# Allegro board LinkingInterfaceV2_16.1.brd
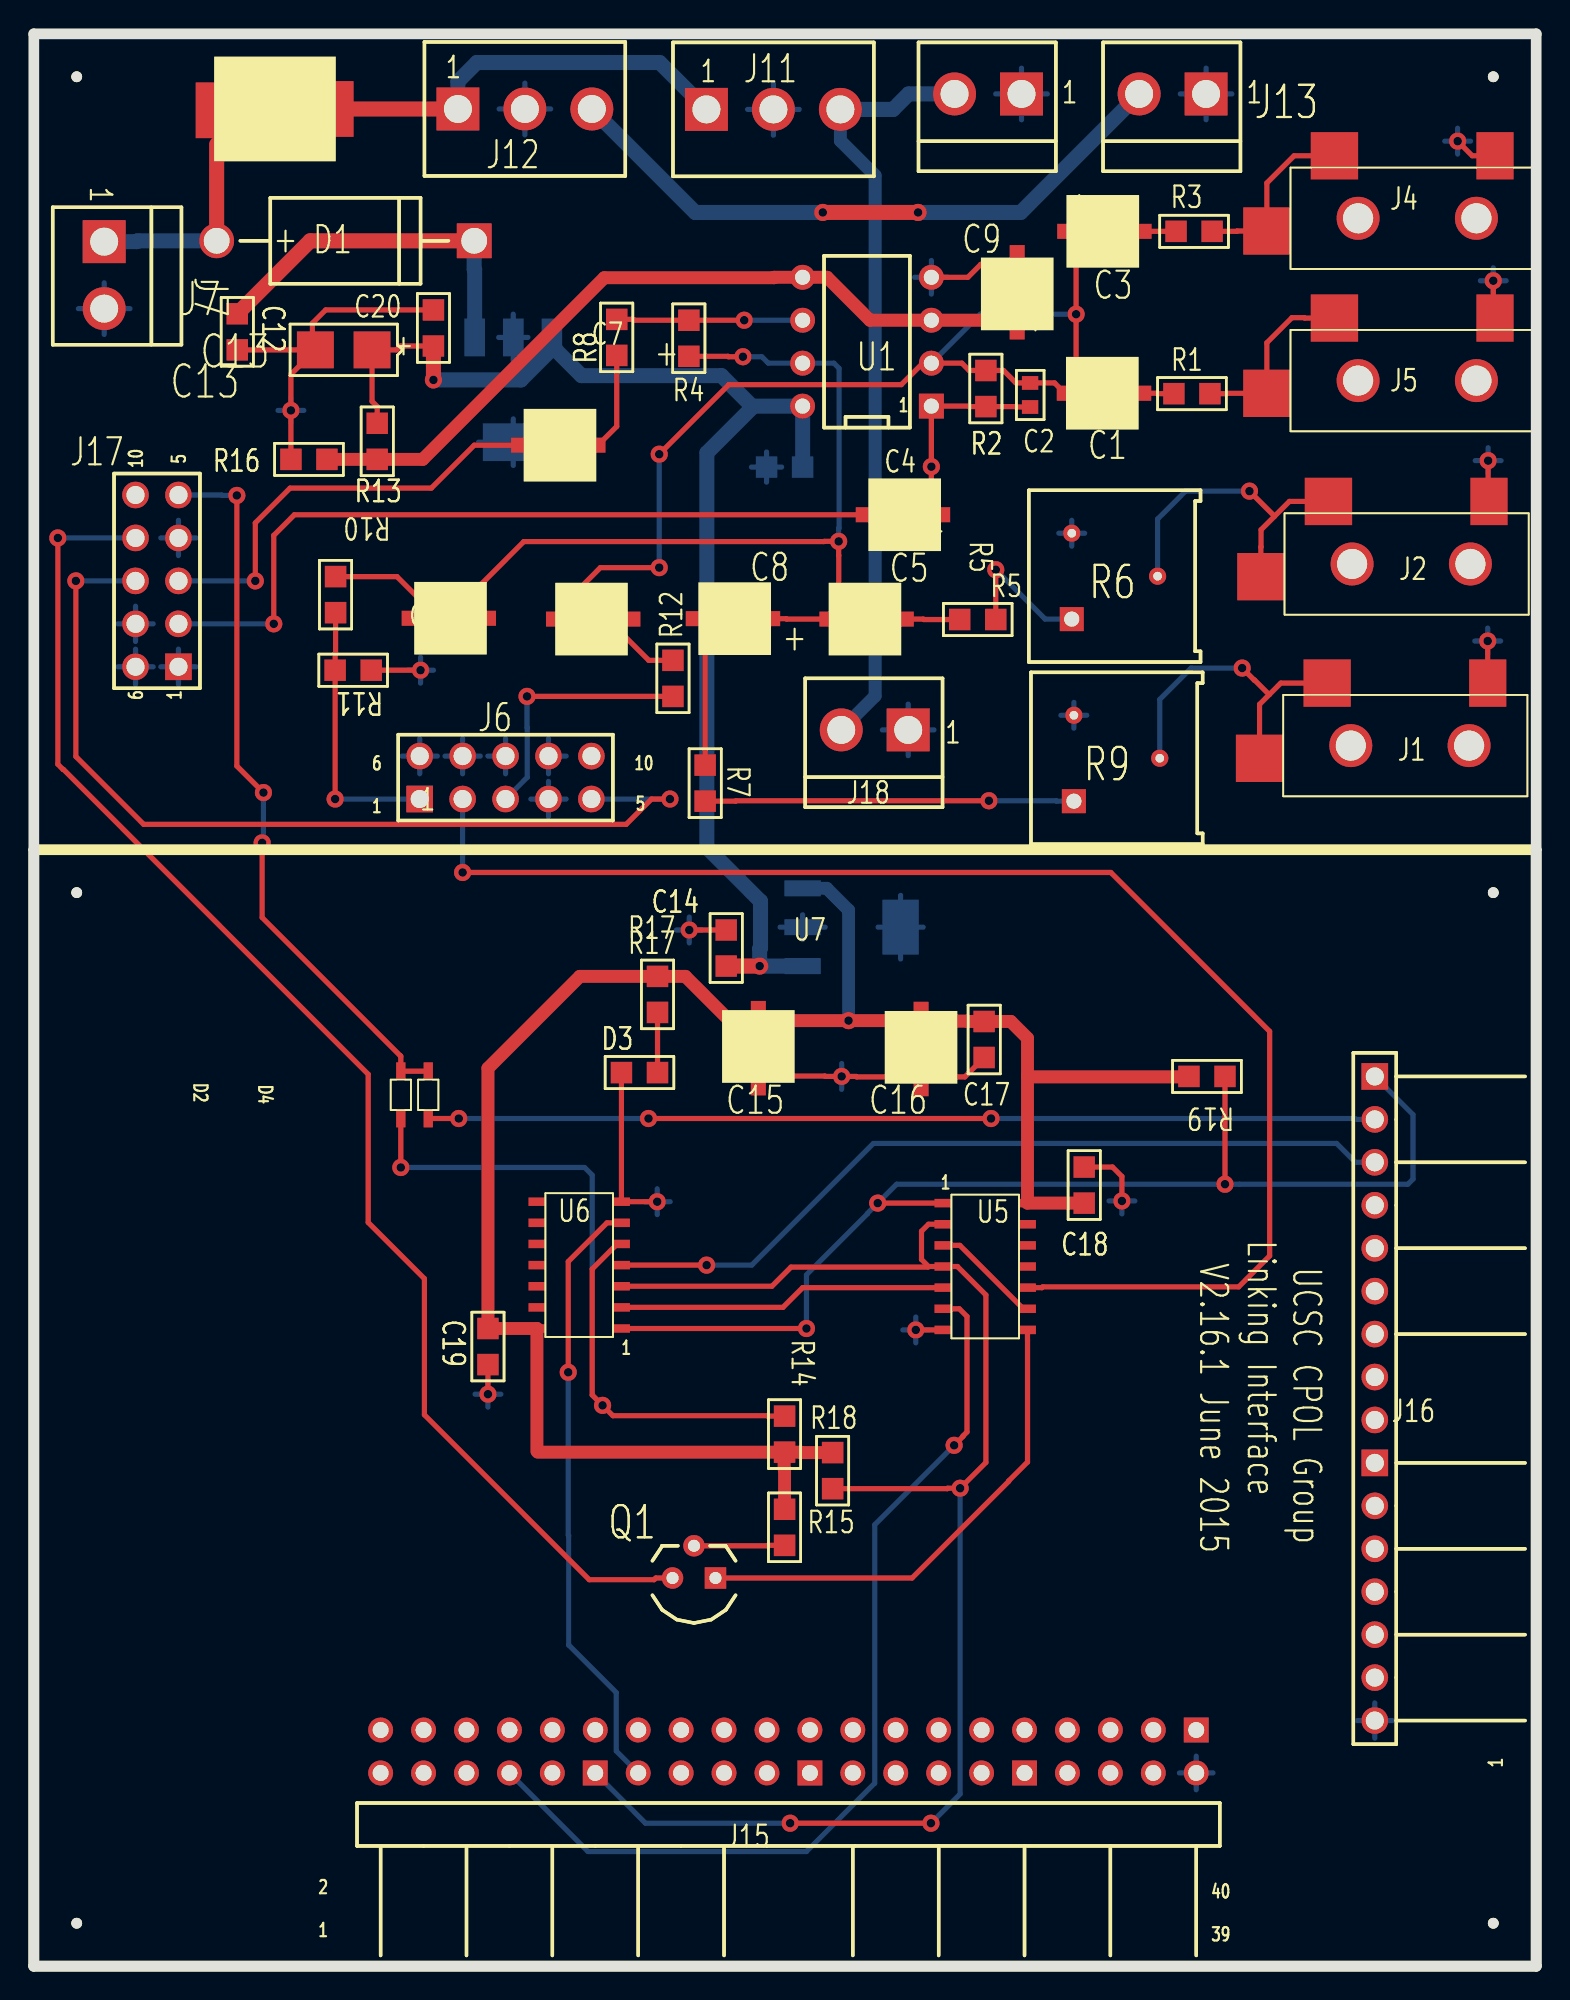
[diagram p0: board, top side]
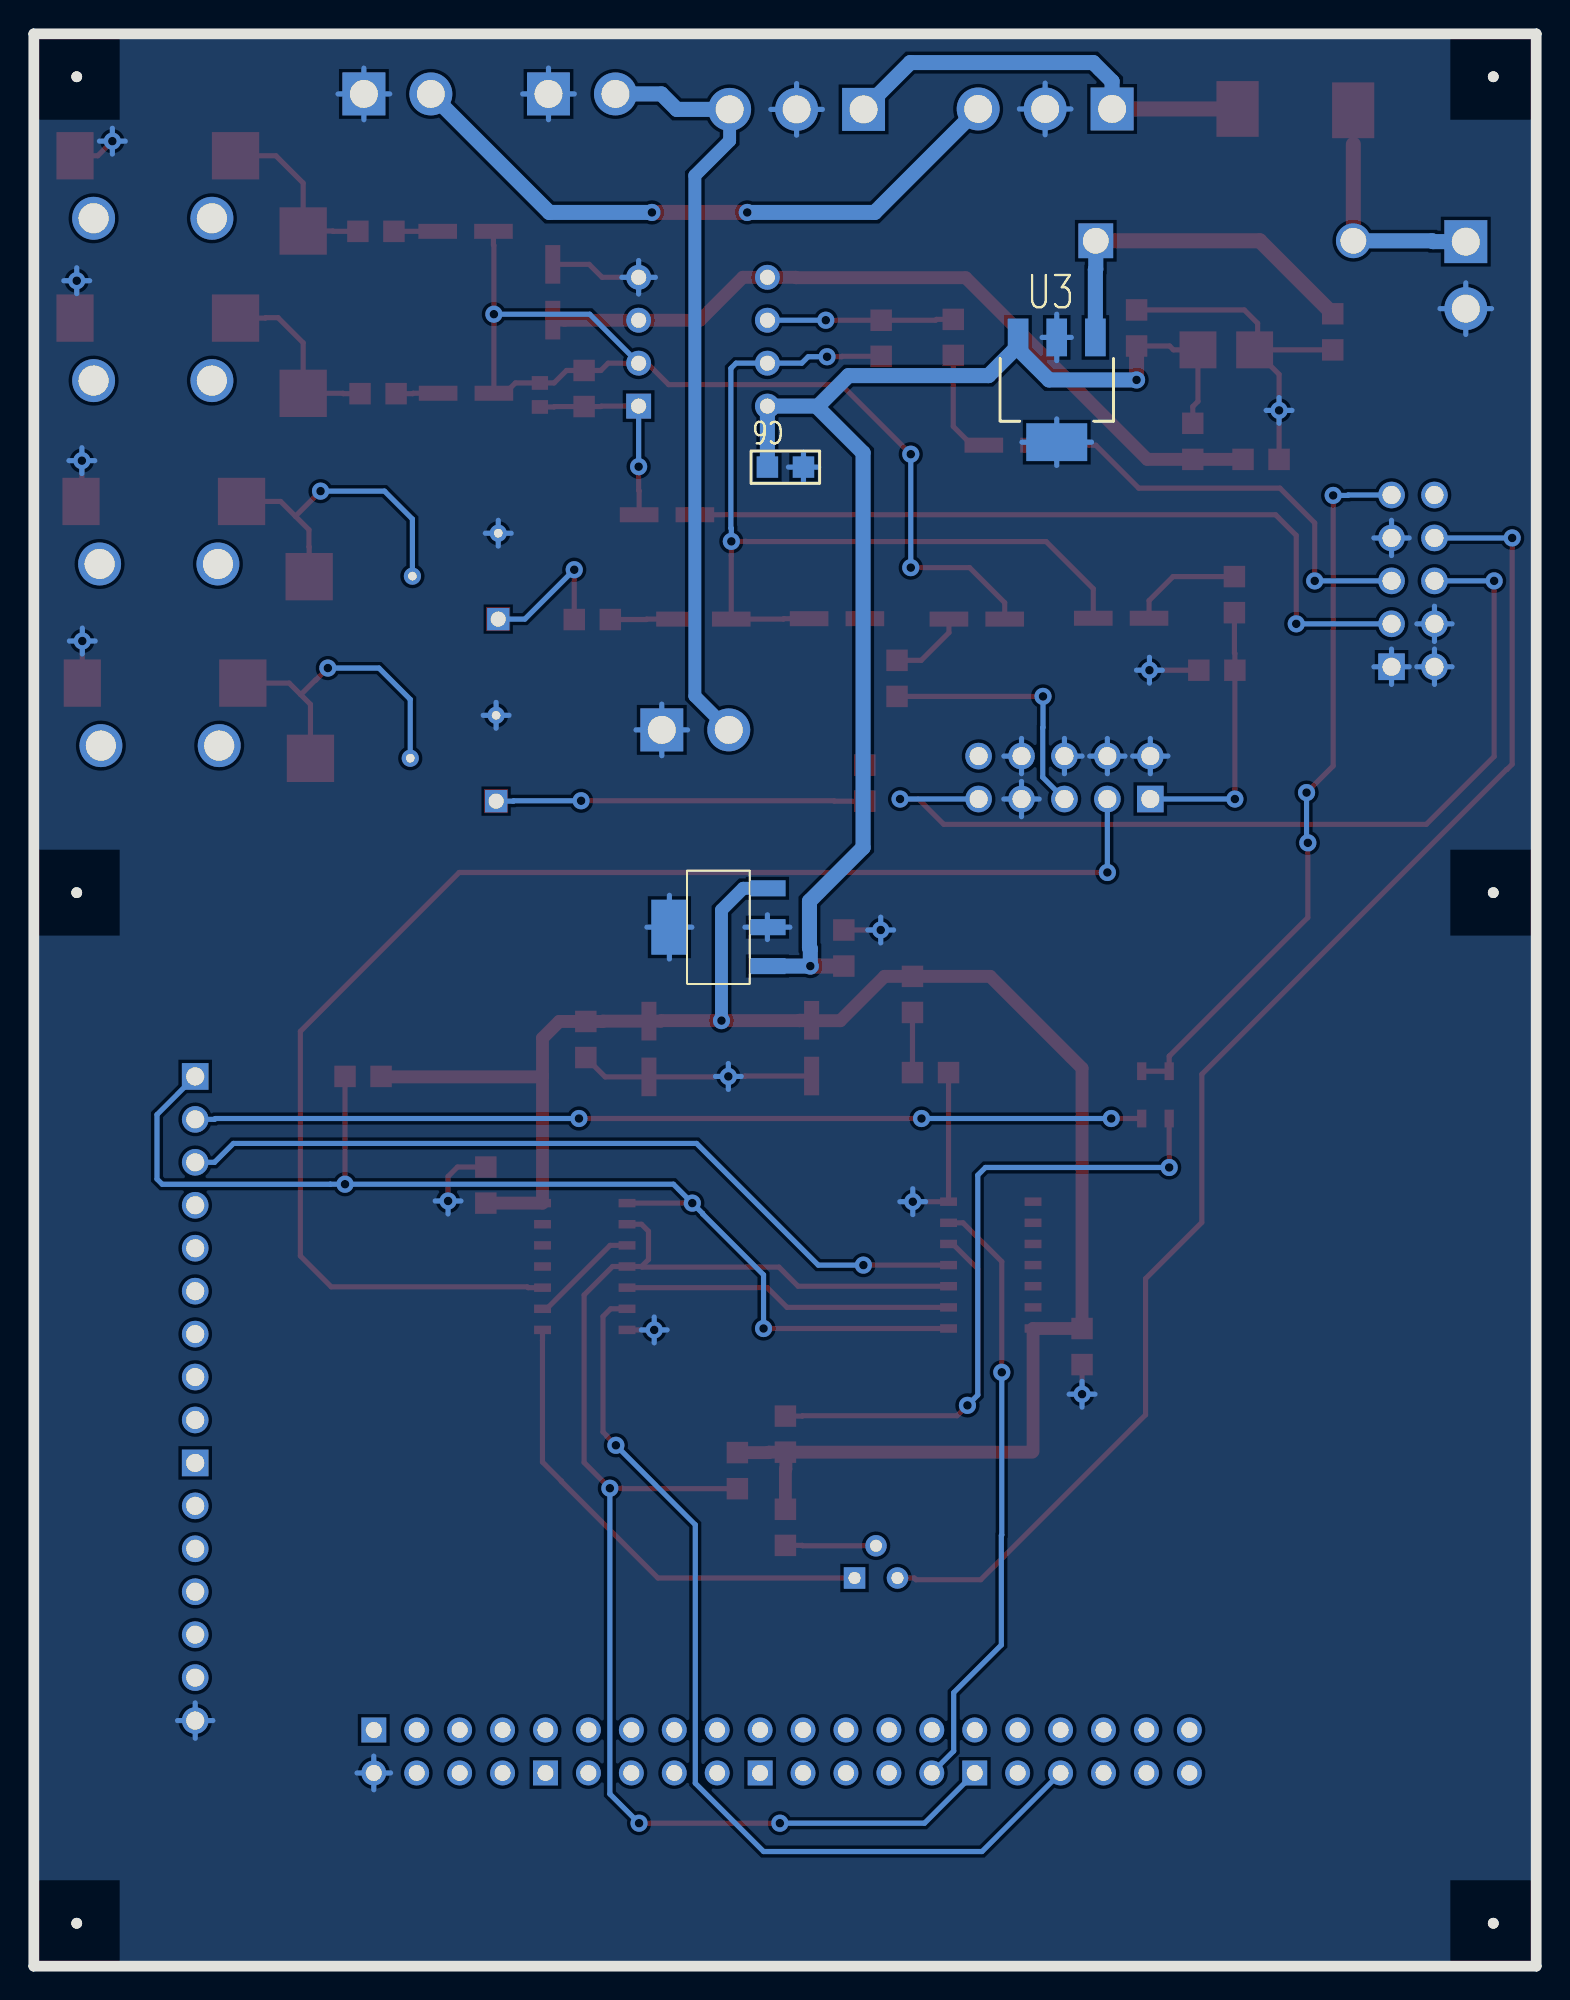
[diagram p1: board, bottom side, seen from below]

Outline 88.9 x 114.3 mm; copper layers: TOP, BOTTOM. Coordinates in mm from the lower left corner of the outline.
Outline path: rectangle 0,0 88.9,114.3 ; 0,114.3 0,0 88.9,0 88.9,114.3 0,114.3

## Placement (name value [footprint] x y rotation side)
C1  10uF  [1_UF_CAP]  61.98 93.04 270 top
C2  100pF  [SMC0603]  58.95 92.23 90 top
C3  10uF  [1_UF_CAP]  62 102.62 270 top
C4  10uF  [1_UF_CAP]  52.78 85.85 90 top
C5  10uF  [1_UF_CAP]  47.93 79.68 270 top
C6  100nF  [SMC0805]  43.36 88.67 0 bottom
C7  1uF  [1_UF_CAP]  32.38 89.97 90 top
C8  10uF  [1_UF_CAP]  42.72 79.71 90 top
C9  4.7uF  [1_UF_CAP]  58.19 97.66 0 top
C10  10uF  [1_UF_CAP]  25.91 79.73 90 top
C11  10uF  [1_UF_CAP]  31.75 79.68 270 top
C12  470nF  [SMC0805]  12.04 97.74 270 top
C13  22uF/Tant  [EIAB_SMCT3528_12]  20.02 95.61 180 top
C14  100nF  [SMC0805]  40.97 61.29 270 top
C15  10uF  [1_UF_CAP]  42.88 55.65 180 top
C16  10uF  [1_UF_CAP]  52.5 55.6 180 top
C17  100nF  [SMC0805]  56.24 53.75 90 top
C18  100nF  [SMC0805]  62.15 47.27 270 top
C19  100nF  [SMC0805]  26.87 37.72 270 top
C20  100nF  [SMC0805]  23.65 97.97 270 top
D1  SB1245  [DAX600_60D]  10.82 102.06 0 top
D2  1N4148  [1N4148_SOD523]  21.72 50.14 0 top
D3  RED  [SMR0805]  36.91 52.86 180 top
D4  1N4148  [1N4148_SOD523]  23.34 50.14 0 top
D5  -  [B320]  10.87 109.86 0 top
J1  TX_Echo  [35MMJACK]  86.51 97.54 0 top
J2  TX_Allstar  [35MMJACK]  86.51 107.14 0 top
J4  RX_Echo  [35MMJACK]  86.16 86.69 0 top
J5  Rx_Allstar  [35MMJACK]  86.08 75.95 0 top
J6  10 Pin Header to DTMF Ctrl  [BCON2DB9_5X2V_100S_42D]  22.83 69.04 0 top
J7  0.156 VH  [BLKCON156_VHTM1SQ_SW156_2]  4.17 102.01 270 top
J11  HEADER 3  [BLKCON156VHTM1SQSW3123]  39.8 109.83 0 top
J12  HEADER 3  [BLKCON156VHTM1SQSW3123]  25.1 109.86 0 top
J13  0.156 VH  [BLKCON156_VHTM1SQ_SW156_2]  69.37 110.74 180 top
J14  0.156 VH  [BLKCON156_VHTM1SQ_SW156_2]  58.45 110.74 180 top
J15  HEADER 20X2  [BLKCON100RHTM2OEW52540]  68.78 13.97 180 top
J16  HEADER 16  [BLKCON100RHTM1SQSW35016]  79.35 52.63 270 top
J17  HEADER 9  [BCON2DB9_5X2V_100S_42D]  8.56 76.86 90 top
J18  0.156 VH  [BLKCON156_VHTM1SQ_SW156_2]  51.74 73.13 180 top
NOREF  -  [unnamed]  86.36 63.5 180 bottom
NOREF#2  -  [unnamed]  2.54 63.5 180 bottom
NOREF#3  -  [unnamed]  86.36 111.76 180 bottom
NOREF#4  -  [unnamed]  2.54 2.54 180 bottom
NOREF#5  -  [unnamed]  2.54 111.76 180 bottom
NOREF#6  -  [unnamed]  86.36 2.54 180 bottom
Q1  2N2222  [TO92R100]  39.07 22.96 180 top
R1  51k  [SMR0805]  67.46 93.01 0 top
R2  51k  [SMR0805]  56.34 92.25 90 top
R3  51k  [SMR0805]  67.59 102.62 0 top
R4  51k  [SMR0805]  38.76 97.36 270 top
R5  7.5k  [SMR0805]  54.79 79.65 0 top
R6  10k  [VRES18_35D]  63.96 82.22 90 top
R7  7.5k  [SMR0805]  39.73 71.04 270 top
R8  51k  [SMR0805]  34.49 95.28 90 top
R9  10k  [VRES18_35D]  64.08 71.45 90 top
R10  7.5k  [SMR0805]  17.86 82.19 270 top
R11  10k  [SMR0805]  19.96 76.66 180 top
R12  51k  [SMR0805]  37.82 77.24 270 top
R13  51k  [SMR0805]  20.32 89.13 90 top
R14  10k  [SMR0805]  44.42 32.54 270 top
R15  10k  [SMR0805]  44.42 27.03 270 top
R16  51k  [SMR0805]  15.21 89.13 0 top
R17  330  [SMR0805]  36.91 56.41 90 top
R18  10k  [SMR0805]  47.27 28.24 90 top
R19  10k  [SMR0805]  70.48 52.63 180 top
U1  TL072  [DIP100_8_W300_L400]  53.11 92.28 90 top
U3  LM2940 / SOT223  LDO  [SOT223_1234]  26.09 96.34 0 bottom
U5  74HC08  [74HC0]  53.8 45.14 270 top
U6  74HC04  [74HC0]  34.77 37.72 90 top
U7  LM2936/SO_5  [LM2936_SOT]  45.44 59.16 90 bottom

## Library data of the parts
C1 C3 C7 C11 = CAPACITOR POL
C2 C6 C12 C14 C17-C20 = C NP
C4 C5 C8-C10 C15 C16 = CAP POL
C13 = C POL
D1 D5 = DIODE SCHOTTKY_0
D2 D4 = 1N4148
D3 = LED
J1 J2 J4 J5 = PHONE JACK-3_2
J6 = HEADER 9_0
J7 J13 J14 J18 = HEADER 2_4
J11 J12 = HEADER 3
J15 = HEADER 20X2
J16 = HEADER 16
J17 = HEADER 9
Q1 = 2N2222
R1-R5 R7 R8 R10-R19 = RESISTOR
R6 R9 = POT
U1 = TL072_0
U3 = 78L05/TO92_0
U5 = 74HC08_4
U6 = 74HC04_5
U7 = LM2936/SO_13

## Footprints (pads in the part's own frame, mm; a bottom-side part is the same pattern mirrored in y, then rotated)
1_UF_CAP
  rect 0.889x2.286 smd: 1(0,-0.3) 2(0,3)
1N4148_SOD523
  rect 0.551x1.049 smd: 1(0,0) 2(0,2.799)
35MMJACK
  round 2.54 hole 1.778: (-8.151,-3.749) (-1.151,-3.749)
  rect 2.2x2.799 smd: 1(-0.051,-0.051)
  rect 2.799x2.799 smd: 2(-9.55,-0.051) 3(-13.551,-4.501)
74HC0
  rect 0.5x1.001 smd: 1(0,0) 2(1.25,0) 3(2.499,0) 4(3.749,0) 5(5.001,0) 6(6.251,0) 7(7.501,0) 8(7.501,5.001) 9(6.251,5.001) 10(5.001,5.001) 11(3.749,5.001) 12(2.499,5.001) 13(1.25,5.001) 14(0,5.001)
B320
  rect 2.499x3.299 smd: 1(-0.041,-0.079) 2(6.8,0)
BCON2DB9_5X2V_100S_42D
  round 1.575 hole 1.067: (10.16,2.54) 2(2.54,0) 3(5.08,0) 4(7.62,0) 5(10.16,0) 6(0,2.54) 7(2.54,2.54) 8(5.08,2.54) 9(7.62,2.54)
  rect 1.575x1.575 hole 1.067: 1(0,0)
BLKCON100RHTM1SQSW35016
  rect 1.575x1.575 hole 1.067: 1(0,0) 10(22.86,0)
  round 1.575 hole 1.067: 2(2.54,0) 3(5.08,0) 4(7.62,0) 5(10.16,0) 6(12.7,0) 7(15.24,0) 8(17.78,0) 9(20.32,0) 11(25.4,0) 12(27.94,0) 13(30.48,0) 14(33.02,0) 15(35.56,0) 16(38.1,0)
BLKCON100RHTM2OEW52540
  rect 1.473x1.473 hole 0.94: 1(0,0) 10(10.16,2.54) 20(22.86,2.54) 30(35.56,2.54)
  round 1.473 hole 0.94: 2(0,2.54) 3(2.54,0) 4(2.54,2.54) 5(5.08,0) 6(5.08,2.54) 7(7.62,0) 8(7.62,2.54) 9(10.16,0) 11(12.7,0) 12(12.7,2.54) 13(15.24,0) 14(15.24,2.54) 15(17.78,0) 16(17.78,2.54) 17(20.32,0) 18(20.32,2.54) 19(22.86,0) 21(25.4,0) 22(25.4,2.54) 23(27.94,0) 24(27.94,2.54) 25(30.48,0) 26(30.48,2.54) 27(33.02,0) 28(33.02,2.54) 29(35.56,0) 31(38.1,0) 32(38.1,2.54) 33(40.64,0) 34(40.64,2.54) 35(43.18,0) 36(43.18,2.54) 37(45.72,0) 38(45.72,2.54) 39(48.26,0) 40(48.26,2.54)
BLKCON156_VHTM1SQ_SW156_2
  rect 2.54x2.54 hole 1.651: 1(0,0)
  round 2.54 hole 1.651: 2(3.962,0)
BLKCON156VHTM1SQSW3123
  rect 2.54x2.54 hole 1.651: 1(0,0)
  round 2.54 hole 1.651: 2(3.962,0) 3(7.925,0)
DAX600_60D
  round 2.057 hole 1.524: 1(0,0)
  rect 2.057x2.057 hole 1.524: 2(15.24,0)
DIP100_8_W300_L400
  rect 1.473x1.473 hole 0.889: 1(0,0)
  round 1.473 hole 0.889: 2(2.54,0) 3(5.08,0) 4(7.62,0) 5(7.62,7.62) 6(5.08,7.62) 7(2.54,7.62) 8(0,7.62)
EIAB_SMCT3528_12
  rect 2.184x2.184 smd: 1(0,0) 2(3.353,0)
LM2936_SOT
  rect 0.95x2.149 smd: 1(0,0.051) 2(2.301,0.051) 3(4.6,0.051)
  rect 3.251x2.149 smd: 4(2.301,5.85)
SMC0603
  rect 0.813x0.965 smd: 1(0,0) 2(1.422,0)
SMC0805
  rect 1.27x1.27 smd: 1(0,0) 2(2.134,0)
SMR0805
  rect 1.27x1.27 smd: 1(0,0) 2(2.134,0)
SOT223_1234
  rect 1.219x2.235 smd: 1(0,0) 2(2.286,0) 3(4.572,0)
  rect 3.607x2.235 smd: 4(2.286,6.198)
TO92R100
  rect 1.27x1.27 hole 0.711: 1(-1.27,0)
  round 1.27 hole 0.711: 2(0,-1.905) 3(1.27,0)
unnamed
  round 0.635 hole 3.175 unplated: (0,0)
VRES18_35D
  rect 1.422x1.422 hole 0.889: 1(-2.54,2.54)
  round 1.016 hole 0.508: 2(0,-2.54) 3(2.54,2.54)

## Nets
+3.3V: C15.1 C16.1 C17.2(B) C18.2(B) C19.1(A) R14.2 R15.1 R17.2 R18.2 R19.2 U5.14(+3.3V) U6.14(+3.3V) U7.3(+3.3V)
+4.5V: C9.1 R13.1 R16.2 U1.3(+IN) U1.5(+IN)
+9V: C6.2(B) C13.1(P) C14.2(B) C20.2(B) R13.2 U1.8(+9V) U3.3(+9V) U7.1(+9V)
GND: C6.1(A) C9.2 C12.2(B) C13.2(N) C14.1(A) C15.2 C16.2 C17.1(A) C18.1(A) C19.2(B) C20.1(A) D3.2(CATHODE) J1.1 J2.1 J4.1 J5.1 J6.4 J6.6 J6.7 J6.8 J6.9 J7.2 J11.2 J12.2 J13.1 J14.1 J15.2 J16.16 J17.1 J17.4 J17.6 J17.7 J18.1 R6.3(B) R9.3(B) R11.1 R16.1 U1.4(GND) U3.2(G1) U3.4(G2) U5.7(GND) U6.7(GND) U7.2(GND#2) U7.4(GND#4)
AUDIO_AUX: C7.2 J17.3
AUDIOOUT: C4.2 J17.2
COS: D2.2 D4.2 J17.5
COS_ALLSTAR: D4.1 J16.2
DTMF_AUDIO: J6.1 R10.2 R11.2
DTMF_TONE_CONFIRMATION: J6.3 R12.2
INHIBIT: J6.5 J17.8
PTT: J17.9 Q1.3(COLLECTOR)
PTT_E: J15.30 R18.1 U5.2(B) U5.4(A) U6.3(A)
RX_A: J5.2 J5.3 R9.2(WIPER)
RX_E: J4.2 J4.3 R6.2(WIPER)
TX_A: J2.2 J2.3 R3.2
N88559: C1.1 C2.2(B) C3.1 C11.1 R2.2 U1.2(-IN)
N88575: C2.1(A) C4.1 R2.1 U1.1(OUT)
N89923: C5.1 C8.1 C10.1 R4.2 U1.7(OUT)
N90145: C1.2 R1.1
N90149: C3.2 R3.1
N90849: R4.1 R8.2 U1.6(-IN)
N96497: J15.34 U5.6(Y)
N134507: C5.2 R5.1
N134567: C10.2 R10.1
N134575: C8.2 R7.1
N134810: R5.2 R6.1(A)
N196050: J1.2 J1.3 R1.2
N904010: R7.2 R9.1(A)
N908810: C7.1 R8.1
N14521945: C12.1(A) D1.2(CATHODE) U3.1(IN)
N14527017: J16.1 R19.1 U5.1(A) U6.1(A)
N14538770: D1.1(ANODE) D5.1(ANODE) J7.1
N14545130: J16.3 U6.4(Y)
N14551658: C11.2 R12.1
N14566981: J6.2 U5.10(B)
N14592870: J15.28 U6.6(Y)
N14597991: U5.5(B) U6.2(Y)
N14601768: D5.2(CATHODE) J11.1 J12.1
N14603309: J11.3 J14.2 J18.2
N14603313: J12.3 J13.2
N14619662: D2.1 R14.1 U6.5(A)
N14629991: Q1.1(EMITTER) U5.8(Y)
N14637572: U5.3(Y) U5.9(A)
N145714160: D3.1(ANODE) R17.1
N146226602: Q1.2(BASE) R15.2

Pads without a net: J15 1 3 4 5 6 7 8 9 10 11 12 13 14 15 16 17 18 19 20 21 22 23 24 25 26 27 29 31 32 33 35 36 37 38 39 40; J16 4 5 6 7 8 9 10 11 12 13 14 15; U5 11 12 13; U6 8 9 10 11 12 13

## Via types
v1: diameter 1.016, hole 0.508, TOP to BOTTOM, 53 vias

## Routing (per net, layer and track width the routed paths; a pad name or vN(x,y) marks a point on that pad's centre or on a via; arc(x,y) is an arc through that point)
+3.3V: length 115.4
  TOP w0.305: 29.82,30.4 29.77,30.45
  TOP w0.762: 43.6,55.93 v1(48.21,55.93) 51.77,55.93 51.8,55.9 C16.1 55.22,55.9 55.24,55.88 C17.2 57.81,55.88 58.8,54.89 58.8,52.65 ; 43.6,55.93 43.58,55.95 C15.1 ; 43.6,55.93 43.6,55.93 41.18,55.93 38.56,58.55 R17.2 32.31,58.55 26.87,53.11 C19.1 U6.14 29.77,30.45 ; 58.8,52.65 U5.14 C18.2 ; 58.8,52.65 58.85,52.6 68.12,52.6 68.15,52.63 R19.2 ; 44.4,30.4 29.82,30.4 ; 44.4,30.4 44.4,29.41 44.42,29.39 R15.1 ; 44.4,30.4 R14.2 45.39,30.4 45.42,30.38 R18.2
  BOTTOM w0.762: v1(48.21,55.93) 48.21,62.47 46.92,63.76 U7.3
+4.5V: length 46.4
  TOP w0.762: C9.1 57.49,97.36 57.48,97.36 U1.3 49.48,97.36 46.94,99.9 U1.5 43.81,99.9 43.79,99.87 33.76,99.87 23.01,89.13 R13.1 R16.2
+9V: length 78.7
  TOP w0.305: R13.2 20.32,92.25 20.02,92.56 C13.1 21.46,95.61 21.69,95.83 C20.2
  TOP w0.889: C14.2 v1(42.95,59.16) ; C20.2 v1(23.65,93.83)
  BOTTOM w0.305: 42.6,92.28 42.55,92.23 ; 30.66,95.83 U3.3
  BOTTOM w0.889: C6.2 U1.8 42.6,92.28 ; v1(23.65,93.83) 28.83,93.83 30.66,95.66 30.66,95.83 32.41,94.08 40.69,94.08 42.55,92.23 39.83,89.51 39.83,66.16 43,62.99 43,60.24 42.95,60.19 v1(42.95,59.16) U7.1
GND: length 223.7
  TOP w0.305: C18.1 63.83,47.27 64.39,46.71 v1(64.39,45.26) ; R16.1 v1(15.21,92.02) 15.21,94.16 C13.2 ; J2.1 85.12,107.09 v1(84.25,107.95) ; v1(36.89,45.22) U6.7 D3.2 ; C14.1 v1(38.79,61.29) ; v1(86.06,89.05) 86.06,86.69 J4.1 ; C13.2 C12.2 ; C13.2 16.48,95.78 16.48,97.18 17.27,97.97 C20.1 ; C19.2 v1(26.87,33.83) ; C15.2 46.81,52.65 46.84,52.63 v1(47.8,52.63) 48.67,52.63 48.69,52.6 C16.2 55.09,52.6 C17.1 ; U5.7 v1(52.19,37.64) ; J1.1 86.36,97.59 v1(86.36,99.69) ; J5.1 v1(86.03,78.38) ; R11.1 v1(22.89,76.66) ; C9.2 56.03,100.66 55.27,99.9 U1.4
  BOTTOM w0.305: 29.06,108.33 J12.2 ; J12.2 30.58,109.86 ; J12.2 29.06,111.38 ; J12.2 27.53,109.86 ; 6.02,75.82 J17.6 ; J17.6 7.06,76.86 ; J17.6 4.98,76.86 ; J17.6 6.02,77.9 ; J6.8 27.91,72.62 ; J6.8 26.87,71.58 ; J6.8 27.91,70.53 ; J17.7 6.02,80.44 ; J17.7 6.02,78.36 ; J17.7 7.06,79.4 ; J17.7 4.98,79.4 ; R9.3 62.31,73.99 ; R9.3 61.54,73.23 ; R9.3 61.54,74.75 ; R9.3 60.78,73.99 ; R6.3 62.18,84.76 ; R6.3 61.42,85.52 ; R6.3 60.65,84.76 ; R6.3 61.42,84 ; v1(86.03,78.38) 86.03,79.15 ; v1(86.03,78.38) 86.79,78.38 ; v1(86.03,78.38) 86.03,77.62 ; v1(86.03,78.38) 85.27,78.38 ; 86.36,98.93 v1(86.36,99.69) ; v1(86.36,99.69) 87.12,99.69 ; v1(86.36,99.69) 85.6,99.69 ; v1(86.36,99.69) 86.36,100.46 ; 83.49,107.95 v1(84.25,107.95) ; v1(84.25,107.95) 84.25,107.19 ; v1(84.25,107.95) 85.02,107.95 ; v1(84.25,107.95) 84.25,108.71 ; 29.41,69.04 J6.4 ; J6.4 31.5,69.04 ; J6.4 30.45,67.99 ; J6.4 30.45,70.08 ; 28.37,88.77 U3.4 ; U3.4 28.37,91.52 ; U3.4 26.31,90.14 ; U3.4 30.43,90.14 ; 43.36,87.78 C6.1 ; C6.1 42.47,88.67 ; C6.1 43.36,89.56 ; C6.1 44.25,88.67 ; v1(64.39,45.26) 65.15,45.26 ; v1(64.39,45.26) 63.62,45.26 ; v1(64.39,45.26) 64.39,44.5 ; U7.2 46.82,61.46 ; U7.2 45.49,60.73 ; U7.2 44.16,61.46 ; U7.2 45.49,62.19 ; 79.35,13.48 J16.16 ; J16.16 80.39,14.53 ; J16.16 79.35,15.57 ; J16.16 78.31,14.53 ; J6.7 26.42,71.58 ; J6.7 25.37,70.53 ; J6.7 24.33,71.58 ; J6.7 25.37,72.62 ; v1(86.06,89.05) 86.82,89.05 ; v1(86.06,89.05) 86.06,89.82 ; v1(86.06,89.05) 85.29,89.05 ; v1(86.06,89.05) 86.06,88.29 ; J6.6 22.83,72.62 ; J6.6 22.83,70.53 ; J6.6 21.79,71.58 ; J6.6 23.88,71.58 ; J14.1 58.45,112.27 ; J14.1 58.45,109.22 ; J14.1 56.92,110.74 ; J14.1 59.97,110.74 ; J13.1 69.37,112.27 ; J13.1 67.84,110.74 ; J13.1 69.37,109.22 ; J13.1 70.89,110.74 ; v1(22.89,76.66) 23.65,76.66 ; v1(22.89,76.66) 22.89,77.42 ; v1(22.89,76.66) 22.89,75.89 ; v1(22.89,76.66) 22.12,76.66 ; v1(52.19,37.64) 52.95,37.64 ; v1(52.19,37.64) 52.19,36.87 ; v1(52.19,37.64) 52.19,38.4 ; v1(52.19,37.64) 51.42,37.64 ; v1(36.89,45.22) 37.65,45.22 ; v1(36.89,45.22) 36.89,44.46 ; v1(36.89,45.22) 36.12,45.22 ; v1(36.89,45.22) 36.89,45.98 ; 67.79,11.43 J15.2 ; J15.2 68.78,10.44 ; J15.2 69.78,11.43 ; J15.2 68.78,12.42 ; J7.2 4.17,99.57 ; J7.2 4.17,96.52 ; J7.2 2.64,98.04 ; J7.2 5.69,98.04 ; v1(15.21,92.02) 15.98,92.02 ; v1(15.21,92.02) 15.21,92.79 ; v1(15.21,92.02) 14.45,92.02 ; v1(15.21,92.02) 15.21,91.26 ; v1(38.79,61.29) 39.55,61.29 ; v1(38.79,61.29) 38.79,60.53 ; v1(38.79,61.29) 38.79,62.05 ; v1(38.79,61.29) 38.02,61.29 ; v1(47.8,52.63) 47.8,53.39 ; v1(47.8,52.63) 47.8,51.86 ; v1(47.8,52.63) 48.57,52.63 ; v1(47.8,52.63) 47.04,52.63 ; U1.4 54.1,99.9 ; U1.4 53.11,98.91 ; U1.4 52.12,99.9 ; U1.4 53.11,100.89 ; U7.4 51.29,63.34 ; U7.4 49.96,61.46 ; U7.4 52.62,61.46 ; U7.4 51.29,59.58 ; 28.37,94.97 U3.2 ; U3.2 27.51,96.34 ; U3.2 29.24,96.34 ; U3.2 28.37,97.72 ; J17.4 9.6,84.48 ; J17.4 8.56,83.44 ; J17.4 8.56,85.52 ; J17.4 7.52,84.48 ; 42.24,109.83 J11.2 ; J11.2 43.76,108.3 ; J11.2 45.29,109.83 ; J11.2 43.76,111.36 ; 26.11,33.83 v1(26.87,33.83) ; v1(26.87,33.83) 26.87,33.07 ; v1(26.87,33.83) 27.64,33.83 ; v1(26.87,33.83) 26.87,34.6 ; 50.21,73.13 J18.1 ; J18.1 53.27,73.13 ; J18.1 51.74,74.65 ; J18.1 51.74,71.6 ; 30.45,70.53 J6.9 ; J6.9 30.45,72.62 ; J6.9 31.5,71.58 ; J17.1 9.6,76.86 ; J17.1 8.56,77.9 ; J17.1 8.56,75.82 ; J17.1 7.52,76.86
AUDIO_AUX: length 26.2
  TOP w0.305: C7.2 26.06,89.97 23.52,87.43 15.16,87.43 13.11,85.37 v1(13.11,81.94)
  BOTTOM w0.305: J17.3 v1(13.11,81.94)
AUDIOOUT: length 47
  TOP w0.305: v1(14.2,79.4) 14.2,84.63 15.42,85.85 C4.2
  BOTTOM w0.305: J17.2 v1(14.2,79.4)
COS: length 43.2
  TOP w0.305: v1(12.01,87) 12.01,70.99 v1(13.59,69.42) ; v1(13.51,66.45) 13.51,62.03 21.69,53.85 21.69,53.85 21.72,53.82 D2.2 D4.2
  BOTTOM w0.305: v1(13.59,69.42) 13.59,66.52 v1(13.51,66.45) ; v1(12.01,87) 11.15,87 11.13,87.02 J17.5
COS_ALLSTAR: length 56
  TOP w0.305: v1(36.37,50.14) v1(56.64,50.14) ; D4.1 v1(25.15,50.14)
  BOTTOM w0.305: v1(25.15,50.14) v1(36.37,50.14) ; v1(56.64,50.14) 78.16,50.14 78.21,50.09 J16.2
DTMF_AUDIO: length 16
  TOP w0.305: R10.2 17.86,77.67 17.83,77.65 R11.2 v1(17.83,69.04)
  BOTTOM w0.305: v1(17.83,69.04) J6.1
DTMF_TONE_CONFIRMATION: length 15.2
  TOP w0.305: v1(29.18,75.11) R12.2
  BOTTOM w0.305: J6.3 29.2,70.32 29.2,73.26 29.18,73.28 v1(29.18,75.11)
INHIBIT: length 56
  TOP w0.305: v1(37.64,69.04) 36.55,69.04 35.05,67.54 6.5,67.54 2.49,71.55 v1(2.49,81.94)
  BOTTOM w0.305: J17.8 v1(2.49,81.94) ; J6.5 v1(37.64,69.04)
PTT: length 84.2
  TOP w0.305: v1(1.42,84.48) 1.42,71.09 1.73,70.79 1.75,70.79 19.79,52.76 19.79,43.99 23.11,40.67 23.11,32.61 32.87,22.86 36.7,22.86 36.8,22.96 Q1.3
  BOTTOM w0.305: J17.9 v1(1.42,84.48)
PTT_E: length 87.7
  TOP w0.305: U5.2 52.94,43.89 52.53,43.47 52.53,41.8 52.94,41.39 ; 52.94,41.39 52.91,41.35 44.81,41.35 43.67,40.22 U6.3 ; 52.94,41.39 U5.4 54.65,41.39 56.34,39.7 56.34,29.79 v1(54.81,28.27) 54.08,28.27 54.05,28.24 R18.1 ; v1(53.09,8.46) v1(44.75,8.46)
  BOTTOM w0.305: v1(54.81,28.27) 54.81,10.19 v1(53.09,8.46) ; J15.30 36.2,8.46 v1(44.75,8.46)
RX_A: length 19.1
  TOP w0.305: J5.3 72.53,74.64 73.1,75.21 ; 73.1,75.21 72.24,76.07 72.21,76.07 v1(71.5,76.78) ; 73.1,75.21 73.79,75.9 J5.2
  BOTTOM w0.305: R9.2 66.62,74.93 68.48,76.78 v1(71.5,76.78)
RX_E: length 19.1
  TOP w0.305: v1(71.93,87.25) 73.42,85.76 ; 73.42,85.76 72.62,84.96 72.62,83.96 72.61,83.94 J4.3 ; 73.42,85.76 74.3,86.64 J4.2
  BOTTOM w0.305: v1(71.93,87.25) 68.15,87.25 66.5,85.6 R6.2
TX_A: length 10.8
  TOP w0.305: R3.2 71.19,102.62 71.21,102.64 J2.3 72.96,105.47 74.57,107.09 J2.2
N88559: length 61.1
  TOP w0.305: v1(37.01,89.43) 41.12,93.55 51.33,93.55 52.6,94.82 U1.2 54.91,94.82 55.35,94.39 R2.2 57.38,94.39 58.12,93.65 C2.2 60.4,93.65 61.01,93.04 C1.1 v1(61.68,97.71) 61.68,101.79 61.7,101.82 C3.1 ; C11.1 31.45,80.65 33.53,82.73 v1(37.01,82.73)
  BOTTOM w0.305: U1.2 56.01,97.71 v1(61.68,97.71) ; v1(37.01,82.73) v1(37.01,89.43)
N88575: length 16
  TOP w0.305: C2.1 58.12,92.23 58.09,92.25 R2.1 55.35,92.25 55.32,92.28 U1.1 v1(53.11,88.7) 53.11,87.3 53.08,87.27 C4.1
  BOTTOM w0.305: 53.11,92.38 U1.1 v1(53.11,88.7)
N89923: length 53
  TOP w0.305: C10.1 26.21,81.48 29,84.27 46.75,84.27 46.76,84.28 v1(47.62,84.28) 47.62,83.45 47.63,83.44 C5.1 44.55,79.68 44.52,79.71 C8.1 ; v1(41.96,95.2) 41.1,95.2 41.07,95.22 R4.2
  BOTTOM w0.305: v1(41.96,95.2) 43.08,95.2 43.46,94.82 U1.7 47.35,94.82 47.65,94.51 47.65,85.06 47.62,85.04 v1(47.62,84.28)
N90145: length 2.5
  TOP w0.305: R1.1 66.47,93.01 66.45,93.04 C1.2
N90149: length 2.6
  TOP w0.305: R3.1 C3.2
N90849: length 11
  TOP w0.305: R8.2 35.48,97.41 35.53,97.36 R4.1 v1(42.04,97.36)
  BOTTOM w0.305: U1.6 v1(42.04,97.36)
N96497: length 56.7
  TOP w0.305: v1(54.46,30.81) 54.98,31.33 54.98,31.36 55.22,31.6 55.22,38.43 54.76,38.88 U5.6
  BOTTOM w0.305: v1(54.46,30.81) 49.76,26.11 49.76,10.82 45.72,6.78 32.79,6.78 J15.34
N134507: length 3.9
  TOP w0.305: C5.2 52.63,79.68 52.65,79.65 R5.1
N134567: length 6.7
  TOP w0.305: C10.2 22.91,80.77 21.49,82.19 R10.1
N134575: length 8.7
  TOP w0.305: C8.2 39.72,72.04 39.73,72.03 R7.1
N134810: length 8.7
  TOP w0.305: v1(56.92,82.6) R5.2
  BOTTOM w0.305: R6.1 59.84,79.68 v1(56.92,82.6)
N196050: length 11
  TOP w0.305: R1.2 70.59,93.01 70.61,93.04 J1.3 72.96,96.02 74.45,97.51 75.18,97.51 75.21,97.49 J1.2
N904010: length 21.8
  TOP w0.305: v1(56.52,68.94) 41.55,68.94 41.53,68.91 R7.2
  BOTTOM w0.305: R9.1 60.53,68.91 60.5,68.94 v1(56.52,68.94)
N908810: length 6.5
  TOP w0.305: R8.1 34.49,91.08 33.38,89.97 C7.1
N14521945: length 21.5
  TOP w0.889: C12.1 16.36,102.06 D1.2
  BOTTOM w0.889: U3.1 26.09,100.35 26.06,100.38 D1.2
N14527017: length 69.6
  TOP w0.305: v1(49.94,45.14) U5.1 ; U6.1 v1(45.72,37.72) ; R19.1 v1(70.48,46.25)
  BOTTOM w0.305: J16.1 81.61,50.37 81.61,46.56 81.3,46.25 71.35,46.25 71.35,46.25 v1(70.48,46.25) 51.05,46.25 v1(49.94,45.14) 49.32,44.52 49.32,44.5 45.72,40.89 v1(45.72,37.72)
N14538770: length 14.4
  TOP w0.305: D5.1 10.83,107.77 10.82,107.76
  TOP w0.889: D1.1 10.82,107.76
  BOTTOM w0.889: D1.1 6.15,102.06 6.1,102.01 J7.1
N14545130: length 48
  TOP w0.305: U6.4 v1(39.81,41.47)
  BOTTOM w0.305: J16.3 78.21,47.55 77.09,48.67 49.68,48.67 42.48,41.47 v1(39.81,41.47)
N14551658: length 4.5
  TOP w0.305: R12.1 36.39,77.24 34.75,78.88 C11.2
N14566981: length 84.4
  TOP w0.305: v1(25.37,64.69) 63.73,64.69 73.13,55.3 73.13,42.01 71.3,40.18 59.7,40.18 59.65,40.13 U5.10
  BOTTOM w0.305: J6.2 v1(25.37,64.69)
N14592870: length 36.1
  TOP w0.305: v1(31.62,35.13) 31.62,41.68 33.92,43.97 U6.6
  BOTTOM w0.305: J15.28 34.47,12.73 34.47,16.18 31.65,19 31.65,25.48 31.62,25.5 v1(31.62,35.13)
N14597991: length 19.5
  TOP w0.305: U6.2 44.33,38.97 45.49,40.13 U5.5
N14601768: length 25.4
  TOP w0.889: D5.2 J12.1
  BOTTOM w0.889: J12.1 25.1,111.48 26.21,112.6 37.03,112.6 J11.1
N14603309: length 45.5
  BOTTOM w0.762: J11.3 47.73,107.98 49.78,105.92 49.78,75.13 J18.2
  BOTTOM w0.889: J11.3 50.85,109.83 51.77,110.74 J14.2
N14603313: length 37.8
  TOP w0.889: v1(46.69,103.73) v1(52.32,103.73)
  BOTTOM w0.889: v1(52.32,103.73) 58.39,103.73 J13.2 ; v1(46.69,103.73) 39.14,103.73 J12.3
N14619662: length 50
  TOP w0.305: U6.5 34.52,42.72 33.04,41.24 33.04,33.78 v1(33.66,33.17) 34.27,32.56 43.41,32.56 43.43,32.54 R14.1 ; D2.1 v1(21.72,47.24)
  BOTTOM w0.305: v1(21.72,47.24) 32.59,47.24 33.04,46.79 33.04,33.78 v1(33.66,33.17)
N14629991: length 29.1
  TOP w0.305: Q1.1 51.97,22.96 57.68,28.68 57.68,28.7 58.8,29.82 58.8,37.03 58.8,37.03 U5.8
N14637572: length 6.6
  TOP w0.305: U5.9 58.55,38.88 54.8,42.64 U5.3
N145714160: length 3.6
  TOP w0.305: D3.1 R17.1
N146226602: length 5.4
  TOP w0.305: R15.2 43.43,24.89 43.41,24.87 Q1.2

## Copper pours and planes (outline as drawn; the poured copper is in the pictures)
GND on BOTTOM: -0.13,114.5 -0.13,0.05 89.1,0.05 89.1,114.5

## Text on the board
Board Geometry/Soldermask Bottom: SMB
Ref Des/Silkscreen Bottom: SSB
Board Geometry/Soldermask Top: SMT
Ref Des/Silkscreen Top: 2 | 1 | 40 | 39 | D2 | D4 | C10 | U6 | C7 | J15 | U7 | J18 | C4 | U5 | C2 | J4 | J5 | J16 | J1 | J2 | J17 | D5 | + | D1 | J6 | J12 | C15 | J11 | C8 | U1 | C16 | C5 | C9 | C1 | C3 | V2.16.1 June 2015 | Linking Interface | UCSC CPOL Group | SST
COMPVAL_TYPE_TOP: FIGURE | SIZE | 70.0 | 65.0 | 60.0 | 42.0 | 37.0 | 35.0 | 28.0 | 20.0 | 125.0 | DRILL CHART: TOP to BOTTOM | ALL UNITS ARE IN MILS | PLATED | NON-PLATED | QTY | 8 | 14 | 1 | 18 | 40 | 10 | 3 | 53 | 4 | 6
User.5: BOTTOM
